# Altium PCB PowerSupply.PcbDoc (part 2 of 2)
Units mm, origin at the board's own origin, x right, y up, seen from the top; angles counter-clockwise.
Board outline 97.5 x 39.25 mm, 2 copper layers (Top Layer, Bottom Layer); 55 components, 29 nets, 126 pads, 14 vias.
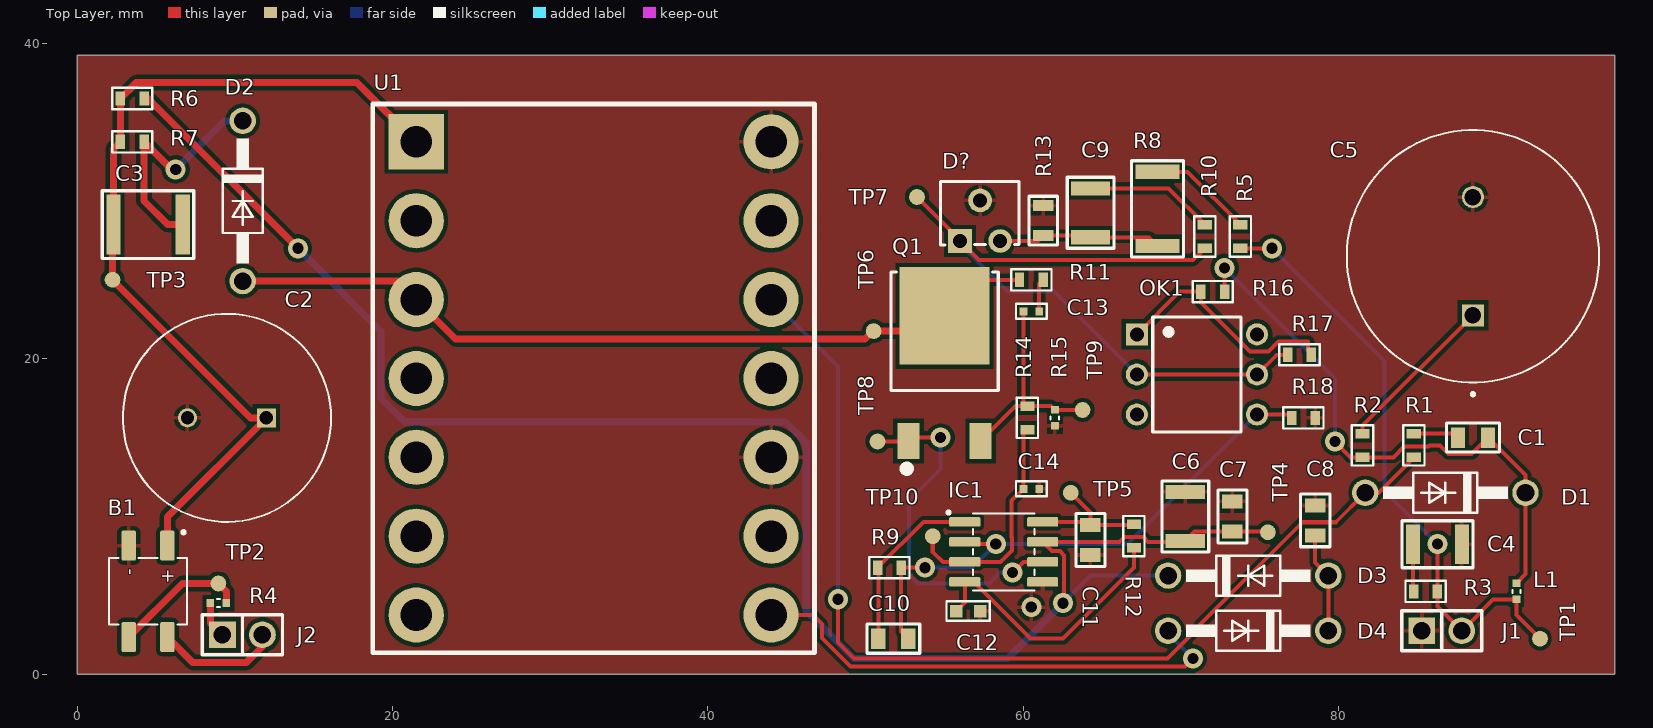
[diagram p0: Top Layer view]

## Part data (continued)
R7: library part ERA-3AEB272V, "Res Thin Film 0603 2.7K Ohm 0.1% 0.1W ±25ppm/°C Molded SMD Punched Carrier T/R", Manufacturer=Panasonic, Voltage Rating (DC)=75V, Category="Chip SMD Resistors", ComponentLink1Description=https://datasheet.ciiva.com/11808/0900766b80fe20f7-11808049.pdf?src-supplier=Rs, ComponentLink1URL=https://datasheet.ciiva.com/11808/0900766b80fe20f7-11808049.pdf?src-supplier=Rs, ComponentLink2Description=https://datasheet.ciiva.com/29183/450927-da-01-en-widerstand-0603-era-29183778.pdf?src-supplier=Conrad, ComponentLink2URL=https://datasheet.ciiva.com/29183/450927-da-01-en-widerstand-0603-era-29183778.pdf?src-supplier=Conrad, ComponentLink3Description=https://datasheet.ciiva.com/9196/aoa0000ce26-9196935.pdf?src-supplier=Avnet, ComponentLink3URL=https://datasheet.ciiva.com/9196/aoa0000ce26-9196935.pdf?src-supplier=Avnet, ComponentLink4Description=https://datasheet.ciiva.com/43457/485442-43457768.pdf?src-supplier=Farnell, ComponentLink4URL=https://datasheet.ciiva.com/43457/485442-43457768.pdf?src-supplier=Farnell, ComponentLink5Description=https://datasheet.ciiva.com/43455/485442-43455224.pdf?src-supplier=Farnell, ComponentLink5URL=https://datasheet.ciiva.com/43455/485442-43455224.pdf?src-supplier=Farnell, ComponentLink6Description=https://datasheet.ciiva.com/48530/era-eng-tds-48530485.pdf?src-supplier=Distrelec, ComponentLink6URL=https://datasheet.ciiva.com/48530/era-eng-tds-48530485.pdf?src-supplier=Distrelec, ComponentLink7Description=https://datasheet.ciiva.com/48425/era-eng-tds-48425448.pdf?src-supplier=Distrelec, ComponentLink7URL=https://datasheet.ciiva.com/48425/era-eng-tds-48425448.pdf?src-supplier=Distrelec, ComponentLink8Description=https://datasheet.ciiva.com/46422/485442-46422632.pdf?src-supplier=Element14, ComponentLink8URL=https://datasheet.ciiva.com/46422/485442-46422632.pdf?src-supplier=Element14, ComponentLink9Description=https://datasheet.ciiva.com/46422/485442-46422633.pdf?src-supplier=Element14, ComponentLink9URL=https://datasheet.ciiva.com/46422/485442-46422633.pdf?src-supplier=Element14, ComponentLink10Description=https://datasheet.ciiva.com/46422/485442-46422634.pdf?src-supplier=Element14, ComponentLink10URL=https://datasheet.ciiva.com/46422/485442-46422634.pdf?src-supplier=Element14, ComponentLink11Description=https://datasheet.ciiva.com/6000/485442-6000521.pdf?src-supplier=Farnell, ComponentLink11URL=https://datasheet.ciiva.com/6000/485442-6000521.pdf?src-supplier=Farnell, ComponentLink12Description=https://datasheet.ciiva.com/6000/485442-6000524.pdf?src-supplier=Farnell, ComponentLink12URL=https://datasheet.ciiva.com/6000/485442-6000524.pdf?src-supplier=Farnell, Lead Free=5697LeadFree, Manufacturer Part Number=ERA-3AEB272V, Pricing 1="1=0.32, 10=0.141, 50=0.141, 100=0.064, 1000=0.044, 10000=0.034 (USD)", RoHS=Yes, Stock 1=90174, Supplier 1=Mouser
R8: library part Y16278K40000T0W, "Res SMD 8.4K Ohm 0.01% 1/2W 2010", Case Code (Imperial)=2010, Case Code (Metric)=5025, Manufacturer="VPG Foil Resistors", Max Operating Temperature=150°C, Max Power Dissipation=500mW, Min Operating Temperature=-55°C, Package Quantity=1000, Resistance=8.4kR, Temperature Coefficient=0.2ppm/°C, Tolerance=0.01%, Case/Package=2010, Category="Chip SMD Resistors", ComponentLink1Description=https://datasheet.ciiva.com/18612/vsmp-18612758.pdf?src-supplier=Digikey, ComponentLink1URL=https://datasheet.ciiva.com/18612/vsmp-18612758.pdf?src-supplier=Digikey, Features="Moisture Resistant", Height=0.025inch, Length=0.198inch, Manufacturer Part Number=Y16278K40000T0W, Number of Terminations=2, Packaging=Tray, Pricing 1="100=16.6732, 110=16.6732, 210=16.6732, 500=16.6732, 1000=16.6732, 5000=16.6732, 10000=16.6732 (USD)", RoHS=No, Series=VSMP, Supplier 1=Avnet, Width=0.097inch
R9: library part MCT06030C4001FP500, "MCT Series Professional Thin Film Chip Resistor 0603 4K Ohm 1% Tolerance 0.125W ±50 ppm/K Surface Mount 2-Pin SMD...", Manufacturer="Vishay Beyschlag", Resistance=4kR, Category="Chip SMD Resistors", ComponentLink1Description=http://www.vishay.com/docs/28705/mcx0x0xpro.pdf?src-supplier=Digikey, ComponentLink1URL=http://www.vishay.com/docs/28705/mcx0x0xpro.pdf?src-supplier=Digikey, Lead Free=5697LeadFree, Manufacturer Part Number=MCT06030C4001FP500, Pricing 1="5000=0.01939, 10000=0.0181, 25000=0.01719, 50000=0.01685, 125000=0.01648 (USD)", RoHS=Yes, RoHS Compliant=Yes, Supplier 1=Digikey
R10: library part CRCW060321K0FKEA, "SMD Chip Resistor, 21 kOhm, ± 1%, 100 mW, 0603 [1608 Metric], Thick Film, General Purpose", Manufacturer=Vishay, Category="Chip SMD Resistors", ComponentLink1Description=https://datasheet.ciiva.com/11811/0900766b80d98afc-11811922.pdf?src-supplier=Rs, ComponentLink1URL=https://datasheet.ciiva.com/11811/0900766b80d98afc-11811922.pdf?src-supplier=Rs, ComponentLink2Description=https://datasheet.ciiva.com/16757/70201119-16757801.pdf?src-supplier=Allied+Electronics, ComponentLink2URL=https://datasheet.ciiva.com/16757/70201119-16757801.pdf?src-supplier=Allied+Electronics, ComponentLink3Description=https://datasheet.ciiva.com/16507/dcrcwe3-16507926.pdf?src-supplier=Future+Electronics, ComponentLink3URL=https://datasheet.ciiva.com/16507/dcrcwe3-16507926.pdf?src-supplier=Future+Electronics, ComponentLink4Description=https://datasheet.ciiva.com/7173/1635184-7173014.pdf?src-supplier=Newark, ComponentLink4URL=https://datasheet.ciiva.com/7173/1635184-7173014.pdf?src-supplier=Newark, ComponentLink5Description=https://datasheet.ciiva.com/22870/70201119-22870809.pdf?src-supplier=Allied+Electronics, ComponentLink5URL=https://datasheet.ciiva.com/22870/70201119-22870809.pdf?src-supplier=Allied+Electronics, ComponentLink6Description=https://datasheet.ciiva.com/2494/dcrcwe3-2494528.pdf?src-supplier=Digikey, ComponentLink6URL=https://datasheet.ciiva.com/2494/dcrcwe3-2494528.pdf?src-supplier=Digikey, ComponentLink7Description=https://datasheet.ciiva.com/2494/dcrcwe3-2494529.pdf?src-supplier=Digikey, ComponentLink7URL=https://datasheet.ciiva.com/2494/dcrcwe3-2494529.pdf?src-supplier=Digikey, ComponentLink8Description=https://datasheet.ciiva.com/2494/dcrcwe3-2494530.pdf?src-supplier=Digikey, ComponentLink8URL=https://datasheet.ciiva.com/2494/dcrcwe3-2494530.pdf?src-supplier=Digikey, ComponentLink9Description=https://datasheet.ciiva.com/3257/dcrcwe3-3257255.pdf?src-supplier=Avnet, ComponentLink9URL=https://datasheet.ciiva.com/3257/dcrcwe3-3257255.pdf?src-supplier=Avnet, ComponentLink10Description=https://datasheet.ciiva.com/5548/dcrcwe3-109170-5548934.pdf?src-supplier=Mouser, ComponentLink10URL=https://datasheet.ciiva.com/5548/dcrcwe3-109170-5548934.pdf?src-supplier=Mouser, ComponentLink11Description=https://datasheet.ciiva.com/7663/1697337-7663909.pdf?src-supplier=Element14, ComponentLink11URL=https://datasheet.ciiva.com/7663/1697337-7663909.pdf?src-supplier=Element14, ComponentLink12Description=https://datasheet.ciiva.com/7663/1697337-7663910.pdf?src-supplier=Element14, ComponentLink12URL=https://datasheet.ciiva.com/7663/1697337-7663910.pdf?src-supplier=Element14, Lead Free=5697LeadFree, Manufacturer Part Number=CRCW060321K0FKEA, Pricing 1="1=0.1, 10=0.017, 50=0.017, 100=0.01, 1000=0.008, 10000=0.004 (USD)", RoHS=Yes, Stock 1=22117, Supplier 1=Mouser
R11: library part RC0603FR-07100RL, "SMD Chip Resistor, 100 Ohm, ± 1%, 100 mW, 0603 [1608 Metric], Thick Film, General Purpose", Case Code (Imperial)=0603, Case Code (Metric)=1608, Manufacturer=Yageo, Max Operating Temperature=155°C, Max Power Dissipation=100mW, Min Operating Temperature=-55°C, Resistance=100R, Resistance Tolerance=1%, Resistor Type="Thick Film", Temperature Coefficient=100ppm/°C, Voltage Rating=50V, Case/Package=0603, Category="Chip SMD Resistors", Construction=Rectangular, Depth=0.8mm, Features="Moisture Resistant", Height=0.45mm, Lead Free="Lead Free", Length=1.6mm, Manufacturer Part Number=RC0603FR-07100RL, Military Standard=Not, Number of Pins=2, Number of Terminations=2, Packaging="Tape and Reel", Power Rating=100mW, Pricing 1="5000=0.0015, 50000=0.0014, 150000=0.0014, 375000=0.0013, 1000000=0.0012 (USD)", Reach SVHC Compliant=Unknown, RoHS=Yes, RoHS Compliant=Yes, Series=RC, Size Code=0603, Stock 1=15275000, Supplier 1="Future Electronics", Technology="THICK FILM", Termination=SMD/SMT, Tolerance=1%, Voltage Rating (DC)=50V, Width=0.8mm
R12: library part ERA-3AEB682V, "Res Thin Film 0603 6.8K Ohm 0.1% 0.1W ±25ppm/°C Molded SMD Punched Carrier T/R", Case Code (Imperial)=0603, Case Code (Metric)=1608, Manufacturer=Panasonic, Max Operating Temperature=155°C, Max Power Dissipation=100mW, Min Operating Temperature=-55°C, Package Quantity=5000, Ratings=AEC-Q200, Resistance=6.8kR, Resistance Tolerance=0.1%, Resistor Type="Thin Film", Temperature Coefficient=25ppm/°C, Voltage Rating=75V, Case/Package=0603, Category="Chip SMD Resistors", ComponentLink1Description=https://datasheet.ciiva.com/11808/0900766b80fe20f7-11808071.pdf?src-supplier=Rs, ComponentLink1URL=https://datasheet.ciiva.com/11808/0900766b80fe20f7-11808071.pdf?src-supplier=Rs, ComponentLink2Description=https://datasheet.ciiva.com/29183/451189-da-01-en-widerstand-0603-era-29183798.pdf?src-supplier=Conrad, ComponentLink2URL=https://datasheet.ciiva.com/29183/451189-da-01-en-widerstand-0603-era-29183798.pdf?src-supplier=Conrad, ComponentLink3Description=https://datasheet.ciiva.com/46436/485442-46436582.pdf?src-supplier=Element14, ComponentLink3URL=https://datasheet.ciiva.com/46436/485442-46436582.pdf?src-supplier=Element14, ComponentLink4Description=https://datasheet.ciiva.com/16765/70068849-16765606.pdf?src-supplier=Allied+Electronics, ComponentLink4URL=https://datasheet.ciiva.com/16765/70068849-16765606.pdf?src-supplier=Allied+Electronics, ComponentLink5Description=https://datasheet.ciiva.com/16781/70068849-16781910.pdf?src-supplier=Allied+Electronics, ComponentLink5URL=https://datasheet.ciiva.com/16781/70068849-16781910.pdf?src-supplier=Allied+Electronics, ComponentLink6Description=https://datasheet.ciiva.com/9195/aoa0000ce26-9195021.pdf?src-supplier=Avnet, ComponentLink6URL=https://datasheet.ciiva.com/9195/aoa0000ce26-9195021.pdf?src-supplier=Avnet, ComponentLink7Description=https://datasheet.ciiva.com/9117/aoa0000ce26-9117749.pdf?src-supplier=Avnet, ComponentLink7URL=https://datasheet.ciiva.com/9117/aoa0000ce26-9117749.pdf?src-supplier=Avnet, ComponentLink8Description=https://datasheet.ciiva.com/43455/485442-43455229.pdf?src-supplier=Farnell, ComponentLink8URL=https://datasheet.ciiva.com/43455/485442-43455229.pdf?src-supplier=Farnell, ComponentLink9Description=https://datasheet.ciiva.com/46436/485442-46436581.pdf?src-supplier=Element14, ComponentLink9URL=https://datasheet.ciiva.com/46436/485442-46436581.pdf?src-supplier=Element14, ComponentLink10Description=https://datasheet.ciiva.com/6137/485442-6137973.pdf?src-supplier=Farnell, ComponentLink10URL=https://datasheet.ciiva.com/6137/485442-6137973.pdf?src-supplier=Farnell, ComponentLink11Description=https://datasheet.ciiva.com/7802/485442-7802270.pdf?src-supplier=Element14, ComponentLink11URL=https://datasheet.ciiva.com/7802/485442-7802270.pdf?src-supplier=Element14, ComponentLink12Description=https://datasheet.ciiva.com/24069/aoa0000ce26-32660-24069673.pdf?src-supplier=Mouser, ComponentLink12URL=https://datasheet.ciiva.com/24069/aoa0000ce26-32660-24069673.pdf?src-supplier=Mouser, ComponentLink13Description=https://datasheet.ciiva.com/16212/aoa0000ce26-16212104.pdf?src-supplier=Future+Electronics, ComponentLink13URL=https://datasheet.ciiva.com/16212/aoa0000ce26-16212104.pdf?src-supplier=Future+Electronics, ComponentLink14Description=https://datasheet.ciiva.com/48425/era-eng-tds-48425486.pdf?src-supplier=Distrelec, ComponentLink14URL=https://datasheet.ciiva.com/48425/era-eng-tds-48425486.pdf?src-supplier=Distrelec, Construction=Rectangular, Contact Plating=Tin, Depth=0.8mm, Features="Automotive AEC-Q200", Height=0.45mm, Lead Free="Lead Free", Length=1.6mm, Manufacturer Part Number=ERA-3AEB682V, Military Standard=Not, Mount="Surface Mount", Number of Pins=2, Number of Terminations=2, Packaging="Tape and Reel", Power Rating=100mW, Pricing 1="1=0.32, 10=0.141, 50=0.141, 100=0.064, 1000=0.044, 10000=0.034 (USD)", Radiation Hardening=No, Reach SVHC Compliant=No, RoHS=Yes, RoHS Compliant=Yes, Series=ERA-3A, Size Code=0603, Stock 1=114872, Supplier 1=Mouser, Technology="METAL FILM", Termination=SMD/SMT, Tolerance=0.1%, Voltage Rating (DC)=75V, Width=0.8mm
R13: library part CRCW08052K49FKEB, "Res Thick Film 0805 2.49K Ohm 1% 1/8W ±100ppm/°C Molded SMD SMD Paper T/R", Case Code (Imperial)=0805, Case Code (Metric)=2012, Manufacturer="Vishay Dale", Max Operating Temperature=155°C, Max Power Dissipation=125mW, Min Operating Temperature=-55°C, Package Quantity=10000, Resistance=2.49kR, Temperature Coefficient=100ppm/°C, Tolerance=1%, Voltage Rating=150V, Case/Package=0805, Category="Chip SMD Resistors", ComponentLink1Description=https://datasheet.ciiva.com/9087/dcrcwe3-9087438.pdf?src-supplier=Avnet, ComponentLink1URL=https://datasheet.ciiva.com/9087/dcrcwe3-9087438.pdf?src-supplier=Avnet, ComponentLink2Description=https://datasheet.ciiva.com/5575/dcrcwe3-109170-5575543.pdf?src-supplier=Mouser, ComponentLink2URL=https://datasheet.ciiva.com/5575/dcrcwe3-109170-5575543.pdf?src-supplier=Mouser, Contact Plating=Tin, Features="Automotive AEC-Q200", Height=0.02inch, Lead Free="Lead Free", Length=0.079inch, Manufacturer Part Number=CRCW08052K49FKEB, Number of Terminations=2, Packaging="Tape and Reel", Power Rating=125mW, Pricing 1="1=0.1, 10=0.033, 50=0.033, 100=0.015, 1000=0.011, 10000=0.006 (USD)", Radiation Hardening=No, RoHS=Yes, RoHS Compliant=Yes, Series=CRCW, Stock 1=30628, Supplier 1=Mouser, Termination=SMD/SMT, Weight=0.000194oz, Width=1.25mm
R14 R17: library part ERJ-3EKF1001V, "Res Thick Film 0603 1K Ohm 1% 1/10W ±100ppm/°C Molded SMD Punched Carrier T/R", Case Code (Imperial)=0603, Case Code (Metric)=1608, Manufacturer=Panasonic, Max Operating Temperature=155°C, Max Power Dissipation=100mW, Min Operating Temperature=-55°C, Package Quantity=5000, Resistance=1kR, Resistance Tolerance=1%, Resistor Type="Thick Film", Temperature Coefficient=100ppm/°C, Voltage Rating=75V, Case/Package=0603, Category="Chip SMD Resistors", Construction=Rectangular, Contact Plating=Tin, Depth=0.8mm, Features="Automotive AEC-Q200", Height=0.45mm, Lead Free=5697LeadFree, Length=1.6mm, Manufacturer Part Number=ERJ-3EKF1001V, Military Standard=Not, Mount="Surface Mount", Number of Pins=2, Number of Terminations=2, Packaging="Tape and Reel", Power Rating=100mW, Pricing 1="1=0.1, 10=0.02, 50=0.02, 100=0.012, 1000=0.008, 10000=0.005 (USD)", Radiation Hardening=No, Reach SVHC Compliant=No, RoHS=Yes, RoHS Compliant=Yes, Series=ERJ, Size Code=0603, Stock 1=2068978, Supplier 1=Mouser, Technology="THICK FILM", Termination=SMD/SMT, Tolerance=1%, Voltage Rating (DC)=75V, Width=0.8mm
R15: library part RMCF0402ZT0R00, "Res Thick Film 0402 0 Ohm Jumper Molded SMD Paper T/R", Case Code (Imperial)=0402, Case Code (Metric)=1005, Current Rating=1A, Manufacturer="Stackpole Electronics", Max Operating Temperature=155°C, Max Power Dissipation=63mW, Min Operating Temperature=-55°C, Resistance=0R, Voltage Rating=50V, Case/Package=0402, Category="Chip SMD Resistors", ComponentLink1Description=https://datasheet.ciiva.com/26835/getdatasheetpartid-409751-26835612.pdf?src-supplier=Verical, ComponentLink1URL=https://datasheet.ciiva.com/26835/getdatasheetpartid-409751-26835612.pdf?src-supplier=Verical, Construction=Rectangular, Contact Plating=Tin,Matte, Depth=0.5mm, Features="Automotive AEC-Q200", Height=0.016inch, Lead Free=5697LeadFree, Length=0.039inch, Manufacturer Part Number=RMCF0402ZT0R00, Military Standard=Not, Mount="Surface Mount", Number of Terminations=2, Packaging="Tape and Reel", Power Rating=63mW, Pricing 1="10000=0.0012, 30000=0.0011 (USD)", Radiation Hardening=No, RoHS=Yes, RoHS Compliant=Yes, Series=RMCF, Stock 1=1190000, Supplier 1="Arrow Electronics", Technology="THICK FILM", Width=0.02inch, Working Voltage=50V
R16 R18: library part RNCF0603TKY2K00, "RNCF Precision Thin Film Chip Resistor 0603 Size 2K Ohm 0.01% 0.1 W 5 ppm/°C 2-Pin SMD T/R", Case Code (Imperial)=0603, Case Code (Metric)=1608, Manufacturer="Stackpole Electronics", Max Operating Temperature=155°C, Max Power Dissipation=100mW, Min Operating Temperature=-55°C, Ratings=AEC-Q200, Resistance=2kR, Temperature Coefficient=5ppm/°C, Tolerance=0.01%, Voltage Rating=75V, Case/Package=0603, Category="Chip SMD Resistors", ComponentLink1Description=https://www.seielect.com/Catalog/SEI-RNCF.pdf?src-supplier=Digikey, ComponentLink1URL=https://www.seielect.com/Catalog/SEI-RNCF.pdf?src-supplier=Digikey, ComponentLink2Description=https://www.seielect.com/catalog/SEI-Packaging.pdf?src-supplier=Digikey, ComponentLink2URL=https://www.seielect.com/catalog/SEI-Packaging.pdf?src-supplier=Digikey, Features="Moisture Resistant,Automotive AEC-Q200", Height=0.022inch, Length=0.063inch, Manufacturer Part Number=RNCF0603TKY2K00, Mount="Surface Mount", Number of Terminations=2, Packaging="Tape and Reel", Pricing 1="1=1.8516, 10=1.5643, 25=1.415, 100=1.196, 250=1.1894, 500=0.8725 (USD)", RoHS=Yes, RoHS Compliant=Yes, Series=RNCF, Stock 1=494, Supplier 1="Arrow Electronics", Width=0.031inch
TP1 TP2 TP3 TP4 TP5 TP6 TP7 TP8 TP9 TP10: library part Test_Point_3
U1: "TF351-2C-2/12VDC Unchecked Electromechanical Relay DPDT 5A 12VDC 134Ohm Plug-In Uncategorized"

## Via types
v1: diameter 1.27, hole 0.711, Top Layer to Bottom Layer, 14 vias

## Nets (pads, with @x,y where several pads share a name; then routed paths per layer and width w, separated by ;. In a path a pad name is that pad's centre, name@x,y a point inside that pad or via, vN(x,y) a via of type N, cw(c..) or ccw(c..) an arc to the next point about the centre after c; other vN are vias at no path point)
GND: B1.2 C2.N C4.1 C5.N C6.1 C7.1 C8.1 C11.2 C12.1 C14.1 D?.A IC1.5 J1.1 R13.1 R15.1 R18.2 U1.8 U1.12
  other v1: 60.5,4.25
NetB1_1: B1.1 C2.P C3.2 R6.2 R7.2 TP3.1 U1.1 | length 56.5
  Top Layer w0.45: B1.1 5.725,9.975 C2.P 11,16.25 TP3.1 2.25,28.45 C3.2 2.3,33.3 R7.2 R6.2 3.75,37.5 17.75,37.5 U1.1
NetB1_3: B1.3 R4.2 TP2.1 | length 8.6
  Top Layer w0.45: B1.3 6.675,5.75 TP2.1 9.472,5.238 R4.2
NetB1_4: B1.4 J2.2 | length 7.9
  Top Layer w0.45: B1.4 7.325,0.75 10.75,0.75 11.75,1.75 J2.2
NetC1_1: C1.1 R1.2 | length 2.9
  Top Layer w0.254: R1.2 87.3,15.25 C1.1
NetC1_2: C1.2 D1.C L1.1 R2.2 R16.2 | length 36.9
  Top Layer w0.254: R16.2 v1(72.75,25.75) ; v1(79.75,14.75) 80.75,13.75 R2.2 83.461,13.75 84.142,14.431 85.681,14.431 85.75,14.5 86.411,14.5 86.942,13.969 88.419,13.969 C1.2 91.83,12.62 D1.C 91.83,6.342 L1.1
  Bottom Layer w0.254: v1(72.75,25.75) 79.75,18.75 v1(79.75,14.75)
NetC3_1: C3.1 D2.C R7.1 | length 15.1
  Top Layer w0.45: v1(6.25,32) 6,32 R7.1 4.25,30 5.75,28.5 C3.1
  Bottom Layer w0.45: v1(6.25,32) 9.33,35.08 D2.C
NetC4_2: C4.2 R3.1 | length 3
  Top Layer w0.254: C4.2 84.7,5.3 R3.1
NetC5_P: C5.P R2.1 | length 10.4
  Top Layer w0.254: R2.1 81.5,15.75 C5.P
NetC6_2: C6.2 C7.2 D3.C IC1.7 R6.1 TP4.1 | length 110.1
  Top Layer w0.254: v1(62.5,4.5) 62.586,4.586 62.586,7.529 62.319,7.796 61.809,7.796 IC1.7 66.096,8.385 66.392,8.681 67.608,8.681 67.904,8.385 70.185,8.385 C6.2 70.85,9.05 C7.2 75.45,9.05 TP4.1
  Top Layer w0.45: R6.1 4.5,36.5 v1(14,27)
  Bottom Layer w0.254: v1(62.5,4.5) 64.25,6.25 D3.C
  Bottom Layer w0.45: v1(14,27) 19.271,21.729 19.271,17.479 20.75,16 42.75,16 42.771,15.979 44.923,15.979 46.229,14.673 46.229,4.021 49.25,1 59,1 v1(62.5,4.5)
NetC8_2: C8.2 D3.A D4.C | length 6.4
  Top Layer w0.254: C8.2 78.5,7.08 D3.A D4.C
NetC9_1: C9.1 R10.2 | length 8.2
  Top Layer w0.254: C9.1 69.2,30.8 R10.2
NetC9_2: C9.2 D?.R R8.1 R13.2 | length 10.4
  Top Layer w0.254: D?.R 60.913,27.463 R13.2 64.15,27.8 C9.2 67.95,27.7 R8.1
NetC10_1: C10.1 IC1.2 OK1.E R9.1 R18.1 | length 35.6
  Top Layer w0.254: C10.1 52.25,2.7 R9.1 v1(53.75,6.75) ; IC1.2 56.415,8.25 v1(58.25,8.25) ; OK1.E 76.79,16.46 R18.1
  Bottom Layer w0.254: v1(53.75,6.75) 56.75,6.75 v1(58.25,8.25) 66.6,8.25 OK1.E
NetC10_2: C10.2 IC1.1 R9.2 | length 11.3
  Top Layer w0.254: C10.2 50.8,6.7 R9.2 53.655,9.655 IC1.1
NetC11_1: C11.1 IC1.8 R12.2 TP5.1 | length 8.5
  Top Layer w0.254: IC1.8 64.045,9.655 C11.1 ; TP5.1 64.25,10.25 C11.1 ; R12.2 66.95,9.45 C11.1
NetC12_2: C12.2 IC1.4 R12.1 | length 17.5
  Top Layer w0.254: C12.2 56.28,4.53 IC1.4 56.965,5.845 57.138,5.672 57.138,5.563 60.451,2.25 62.5,2.25 67,6.75 R12.1
NetC13_1: C13.1 Q1.S R14.2 R15.2 TP9.1 | length 13.6
  Top Layer w0.254: Q1.S 59.504,17 R14.2 ; C13.1 60,17.25 R14.2 ; TP9.1 62.012,16.75 R15.2 61.762,17 R14.2
NetC13_2: C13.2 R11.1 | length 2.1
  Top Layer w0.254: C13.2 61,24.75 R11.1
NetC14_2: C14.2 IC1.3 R14.1 TP10.1 | length 14.7
  Top Layer w0.254: TP10.1 54.25,7.75 54.885,7.115 58.552,7.115 59.266,7.829 59.266,8.671 59.25,8.687 59.25,11 C14.2 60,15.25 R14.1
NetD1_A: D1.A R1.1 U1.10 | length 65.8
  Top Layer w0.254: v1(48.25,4.75) 48.25,2 49.25,1 69.144,1 71.17,3.026 71.17,3.109 77.692,9.631 79.801,9.631 D1.A 82.5,11.5 R1.1
  Bottom Layer w0.254: U1.10 48.25,19.5 v1(48.25,4.75)
NetD2_A: D2.A Q1.D R11.2 TP6.1 U1.3 | length 52.3
  Top Layer w0.254: Q1.D@54.033,21.75 Q1.D 57.283,25 R11.2
  Top Layer w0.45: D2.A 20.33,24.92 24,21.25 49.961,21.25 50.461,21.75 Q1.D@54.033,21.75
NetD4_A: D4.A U1.14 | length 31.2
  Top Layer w0.254: U1.14 46.654,3.75 47.234,3.17 47.234,2.298 49.04,0.492 70.242,0.492 v1(70.75,1)
  Bottom Layer w0.254: D4.A 69.17,2.58 v1(70.75,1)
NetD?_C: D?.C OK1.C R10.1 R17.2 TP7.1 | length 45.2
  Top Layer w0.254: TP7.1 55.978,27.523 D?.C 57.19,26.25 70.75,26.25 R10.1 ; OK1.C@67.19,19 74.81,19 76.06,20.25 R17.2
  Bottom Layer w0.254: D?.C 55.978,27.272 59,24.25 61.94,24.25 OK1.C@67.19,19
NetIC1_6: IC1.6 Q1.G TP8.1 | length 22.9
  Top Layer w0.254: TP8.1 52.681,14.75 Q1.G 52.932,15 v1(54.75,15) ; v1(59.312,6.438) 59.989,7.115 IC1.6
  Bottom Layer w0.254: v1(54.75,15) 54.75,13.016 52.734,11 52.734,6.329 53.329,5.734 57.812,5.734 58.516,6.438 v1(59.312,6.438)
NetJ1_2: J1.2 L1.2 R3.2 R5.2 TP1.1 | length 39
  Top Layer w0.254: R5.2 v1(75.75,27) ; v1(86.25,8.25) R3.2 86.25,4.29 J1.2 89.778,4.738 L1.2 91.25,3.75 TP1.1 TP1.1@93,2.5
  Bottom Layer w0.254: v1(75.75,27) 82.889,19.861 82.889,11.611 v1(86.25,8.25)
NetJ2_1: J2.1 R4.1 | length 2.3
  Top Layer w0.45: R4.1 8.448,3.262 J2.1
NetOK1_A: OK1.A R16.1 R17.1 | length 15.1
  Top Layer w0.254: OK1.A 69.9,24.25 R16.1 71.253,24.247 71.253,23.568 74.362,20.459 75.551,20.459 76.173,21.081 78.041,21.081 78.041,20.459 R17.1
NetR5_1: R5.1 R8.2 | length 6.6
  Top Layer w0.254: R8.2 70.4,31.85 R5.1
pads on no net: OK1.B OK1.NC U1.2 U1.4 U1.5 U1.6 U1.7 U1.9 U1.11 U1.13

## Polygon pours and split planes (outlines as drawn)
GND on Top Layer "GND_L01_P000" (solid, pour order 0): 0,0 0,39.25 97.5,39.25 97.5,0
GND on Bottom Layer "GND_L02_P002" (solid, pour order 2): 0,39.25 97.5,39.25 97.5,0 0,0

## Text inside footprints (layer, text, board x,y; h text height)
B1: Top Overlay "-" at 3.065,6.685 h0.84 r270; Top Overlay "+" at 5.411,6.681 h0.83 r270